# EAGLE board IMU_Board (EAGLE 9.6.2)
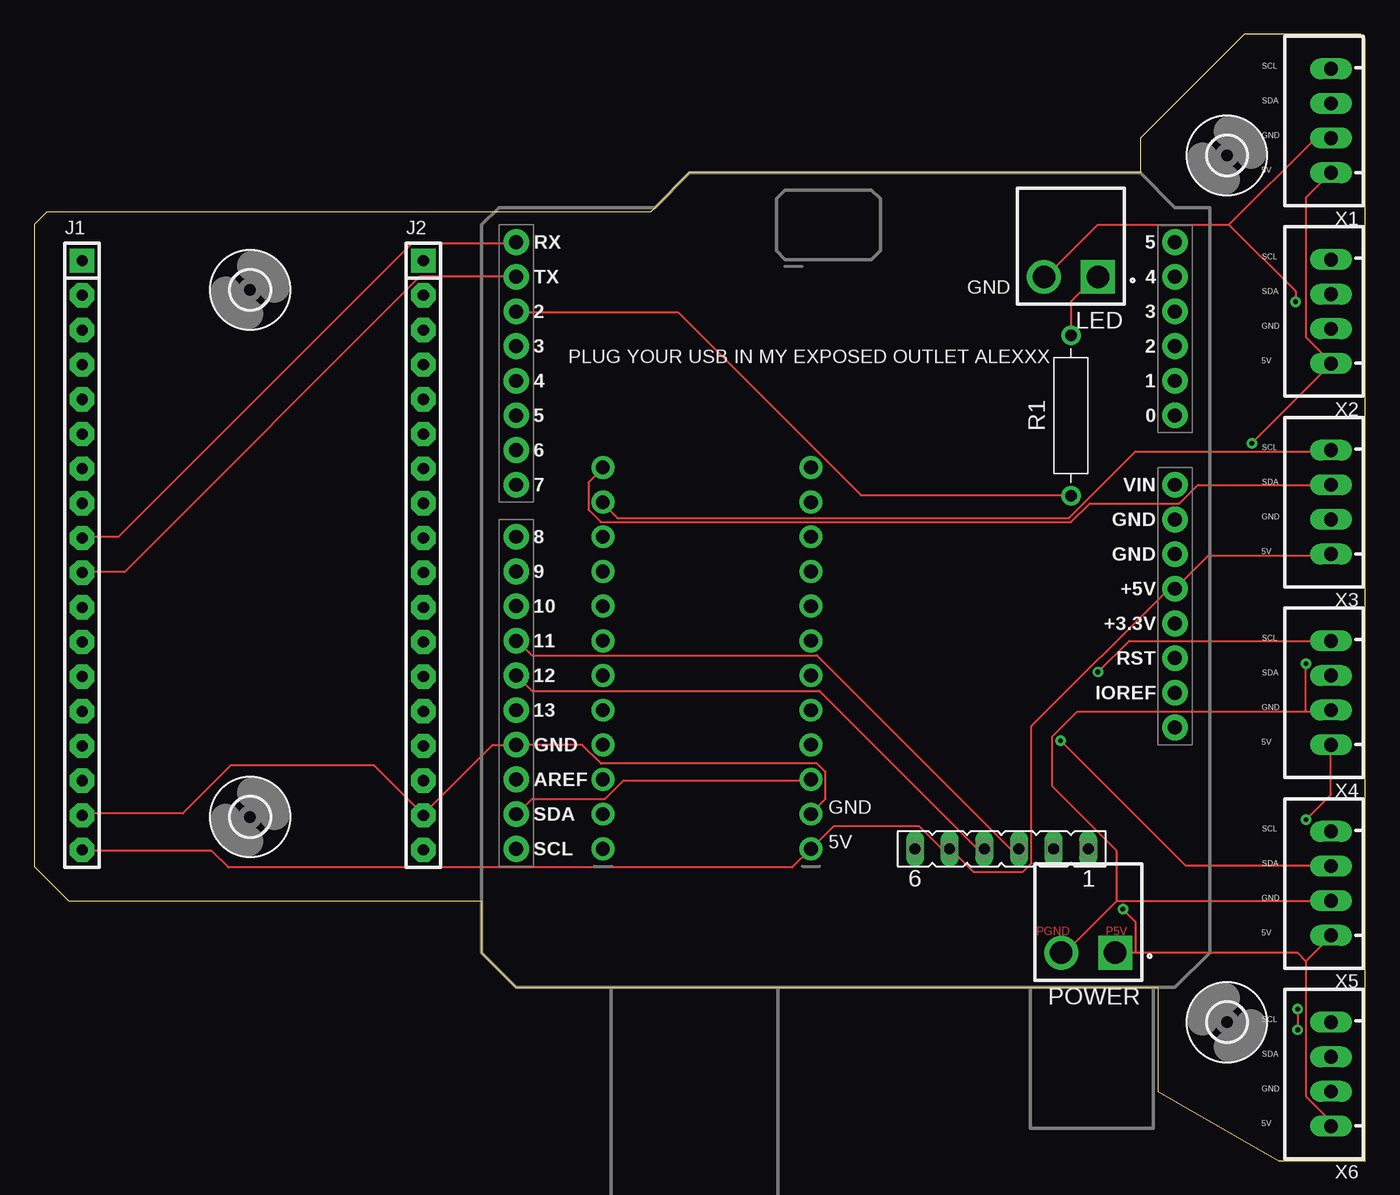
[diagram p0: board, top side]
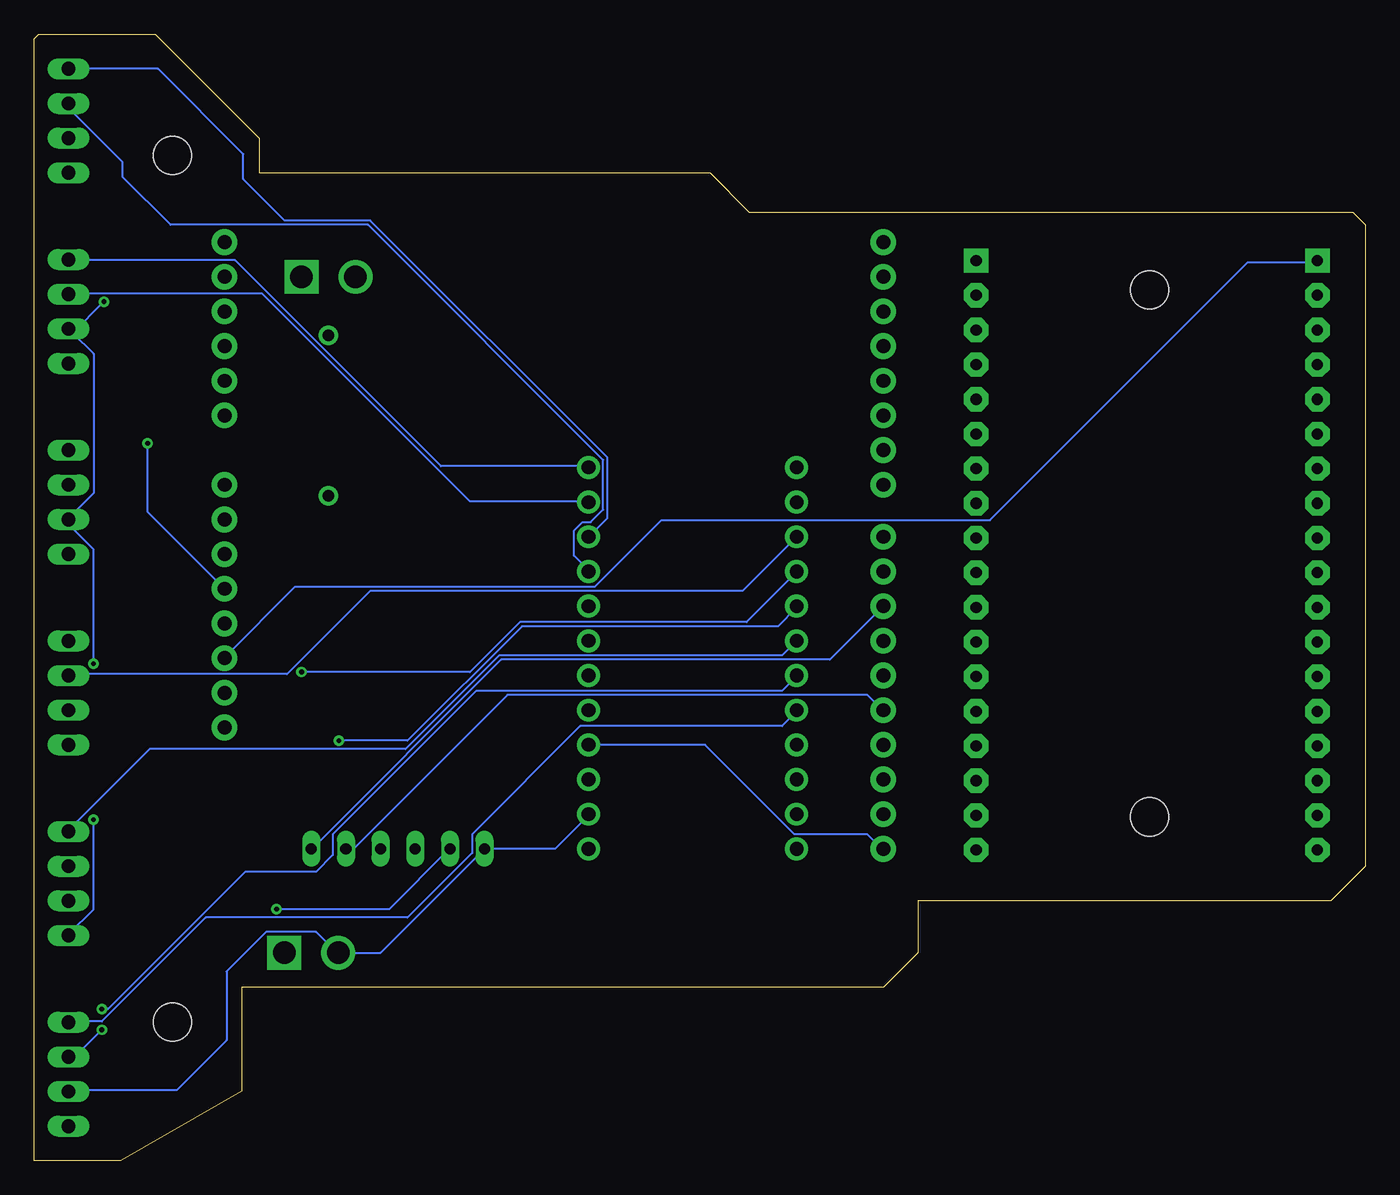
[diagram p1: board, bottom side, seen from below]

Size 97.53 x 82.55 mm. Coordinates in mm from the lower left corner, seen from the top.
Outline: 0,68.58 0,21.59 2.54,19.05 32.78,19.05 32.78,15.24 35.32,12.7 82.31,12.7 82.31,5.08 91.2,0 97.53,0 97.53,82.22 97.2,82.55 88.66,82.55 81.04,74.93 81.04,72.39 48.02,72.39 45.15,69.52 0.94,69.52 0,68.58
Copper layers (1*16): Top 0.035mm / dielectric 1.5mm / Bottom 0.035mm
Design rules "default": minimum track width 6mil, minimum drill 0.35mm, track to track 6mil, track to pad 6mil, pad to pad 6mil, via to via 6mil, smd to smd 6mil, copper to edge 40mil, drill to drill 6mil, minimum pad ring 10mil, minimum via ring 8mil, stop-mask expansion 4mil, vias tented up to drill 0mil, thermal gap 10mil

## Footprints (pad centres in the part's own frame; a part is rotated, then mirrored left to right if it is on the bottom)
UNO_R3_SHIELD = drill 1.016 pad 1.88: 3.3V 24.13,-2.54; 5V 24.13,0; A0 24.13,12.7; A1 24.13,15.24; A2 24.13,17.78; A3 24.13,20.32; A4 24.13,22.86; A5 24.13,25.4; AREF -24.13,-13.97; D2 -24.13,20.32; D3 -24.13,17.78; D4 -24.13,15.24; D5 -24.13,12.7; D6 -24.13,10.16; D7 -24.13,7.62; D8 -24.13,3.81; D9 -24.13,1.27; D10 -24.13,-1.27; D11 -24.13,-3.81; D12 -24.13,-6.35; D13 -24.13,-8.89; GND@0 24.13,2.54; GND@1 24.13,5.08; GND@2 -24.13,-11.43; IOREF 24.13,-7.62; NC 24.13,-10.16; RES 24.13,-5.08; RX -24.13,25.4; SCL -24.13,-19.05; SDA -24.13,-16.51; TX -24.13,22.86; VIN 24.13,7.62
2,8 = hole 2.8: 0,0
SIP-100-18-32 = drill 0.813 pad 1.778 square: 1 -21.59,0 | drill 0.813 pad 1.778 octagon: 2 -19.05,0; 3 -16.51,0; 4 -13.97,0; 5 -11.43,0; 6 -8.89,0; 7 -6.35,0; 8 -3.81,0; 9 -1.27,0; 10 1.27,0; 11 3.81,0; 12 6.35,0; 13 8.89,0; 14 11.43,0; 15 13.97,0; 16 16.51,0; 17 19.05,0; 18 21.59,0
1X12_ROUND = drill 1 pad 1.676: 1 -13.97,0; 2 -11.43,0; 3 -8.89,0; 4 -6.35,0; 5 -3.81,0; 6 -1.27,0; 7 1.27,0; 8 3.81,0; 9 6.35,0; 10 8.89,0; 11 11.43,0; 12 13.97,0
HDR-02 = drill 1.65 square: 1 -1.98,0 | drill 1.65: 2 1.98,0
RESAD1176W63L850D250B = drill 0.83 pad 1.43: 1 -5.88,0; 2 5.88,0
FE06 = drill 0.813 long: 1 -6.35,0; 2 -3.81,0; 3 -1.27,0; 4 1.27,0; 5 3.81,0; 6 6.35,0
JST-XH-04-PACKAGE-LONG-PAD = drill 1.016 long: 1 -3.81,0; 2 -1.27,0; 3 1.27,0; 4 3.81,0

## Placement (x,y rotation side)
B1  ARDUINO_UNO_R3_SHIELDBASIC  [UNO_R3_SHIELD]  59.45,41.91 0 top
H1  MOUNT-HOLE2.8  [2,8]  87.39,73.66 0 top
H2  MOUNT-HOLE2.8  [2,8]  87.39,10.16 90 top
H3  MOUNT-HOLE2.8  [2,8]  15.82,63.81 0 top
H4  MOUNT-HOLE2.8  [2,8]  15.82,25.2 0 top
J1  F-1X18-SIP-100-32  [SIP-100-18-32]  3.51,44.36 270 top
J2  F-1X18-SIP-100-32  [SIP-100-18-32]  28.52,44.36 270 top
JP1  [1X12_ROUND]  41.67,36.83 90 top
JP3  [1X12_ROUND]  56.91,36.83 90 top
LED  B2P-VH(LF)(SN)  [HDR-02]  75.96,64.77 180 top
POWER  B2P-VH(LF)(SN)  [HDR-02]  77.23,15.24 180 top
R1  [RESAD1176W63L850D250B]  75.96,54.61 90 top
SD  [FE06]  70.88,22.86 180 top
X1  JST-XH-04-PIN-LONG-PAD  [JST-XH-04-PACKAGE-LONG-PAD]  95.01,76.2 90 top
X2  JST-XH-04-PIN-LONG-PAD  [JST-XH-04-PACKAGE-LONG-PAD]  95.01,62.23 90 top
X3  JST-XH-04-PIN-LONG-PAD  [JST-XH-04-PACKAGE-LONG-PAD]  95.01,48.26 90 top
X4  JST-XH-04-PIN-LONG-PAD  [JST-XH-04-PACKAGE-LONG-PAD]  95.01,34.29 90 top
X5  JST-XH-04-PIN-LONG-PAD  [JST-XH-04-PACKAGE-LONG-PAD]  95.01,20.32 90 top
X6  JST-XH-04-PIN-LONG-PAD  [JST-XH-04-PACKAGE-LONG-PAD]  95.01,6.35 90 top

## Library data of the parts
B1 = SparkFun-Boards
H1-H4 = holes
J1 J2 = con-headers-jp
JP1 JP3 = microbuilder
LED POWER = Connectors; CREATED_BY: PCBLayout.com; DIGIKEY_PART_NUMBER: 455-1639-ND; MANUFACTURER: JST Sales America Inc.; MPN: B2P-VH(LF)(SN)
R1 = Resistor; CATEGORY: Resistor; SUB-CATEGORY: Fixed
SD = con-lsta; OC_FARNELL: unknown; OC_NEWARK: unknown
X1-X6 = Rembrandt Electronics - JST XH Connectors v1-0

## Nets
0SCL: JP3.10 X1.4
0SDA: JP3.9 X1.3
1SCL: JP3.12 X2.4
1SDA: JP3.11 X2.3
2SCL: JP1.11 X3.4
2SDA: JP1.12 X3.3
3SCL: JP1.9 X4.4
3SDA: JP1.10 X4.3
4SCL: JP1.7 X5.4
4SDA: JP1.8 X5.3
5SCL: JP1.5 X6.4
5SDA: JP1.6 X6.3
6SCL: JP1.3
6SDA: JP1.4
7SCL: JP1.1
7SDA: JP1.2
A5V: B1.5V J1.18 JP3.1 POWER.1 SD.5 X1.1 X2.1 X3.1 X4.1 X5.1 X6.1
AD2: B1.D2 R1.1
AD10: B1.D10 SD.1
AD11: B1.D11 SD.3
AD12: B1.D12 SD.4
AD13: B1.D13 SD.2
AGND: B1.GND@2 J1.17 J2.17 JP3.2 LED.2 POWER.2 SD.6 X1.2 X2.2 X3.2 X4.2 X5.2 X6.2
ARST: B1.RES J1.1
ARX: B1.RX J1.9
ASCL: B1.SCL JP3.4
ASDA: B1.SDA JP3.3
ATX: B1.TX J1.10
R15V: LED.1 R1.2

## Tracks (layer width: path | path; a pad name or v marks a point on that pad's centre or on a via)
0SCL
  Bottom 0.152: X1.4 88.46,80.01 82.21,73.76 82.21,71.93 79.16,68.88 72.91,68.88 55.54,51.51 55.54,47.09 JP3.10
0SDA
  Bottom 0.152: X1.3 95.01,77.11 91.05,73.15 91.05,72.08 87.54,68.58 73.06,68.58 55.84,51.36 55.84,47.7 56.76,46.79 57.37,46.79 57.98,46.18 57.98,44.35 56.91,43.28 JP3.9
1SCL
  Bottom 0.152: X2.4 95.01,65.99 82.82,65.99 67.73,50.9 56.91,50.9 JP3.12
1SDA
  Bottom 0.152: X2.3 95.01,63.55 80.84,63.55 65.6,48.31 56.91,48.31 JP3.11
2SCL
  Top 0.152: X3.4 95.01,51.97 80.68,51.97 75.81,47.09 42.74,47.09 41.67,48.16 JP1.11
2SDA
  Top 0.152: X3.3 85.26,49.53 83.88,48.16 77.33,48.16 75.96,46.79 41.52,46.79 40.6,47.7 40.6,49.68 41.67,50.75 JP1.12
3SCL  (via drill 0.35)
  Top 0.152: X4.4 80.23,38.1 v77.94,35.81
  Bottom 0.152: v77.94,35.81 65.6,35.81 61.94,39.47 45.33,39.47 41.67,43.13 JP1.9
3SDA
  Bottom 0.152: JP1.10 45.63,41.76 72.91,41.76 79.01,35.66 95.01,35.66 X4.3
4SCL
  Bottom 0.152: JP1.7 42.74,37.03 63.46,37.03 70.32,30.18 89.07,30.18 95.01,24.23 X5.4
4SDA  (via drill 0.35)
  Top 0.152: v75.2,30.79 84.34,21.64 95.01,21.64 X5.3
  Bottom 0.152: v75.2,30.79 70.17,30.79 61.79,39.17 43.04,39.17 41.67,40.54 JP1.8
5SCL
  Bottom 0.152: X6.4 95.01,10.21 92.57,10.21 84.95,17.83 70.17,17.83 65.44,22.55 65.44,23.93 57.52,31.85 42.74,31.85 41.67,32.92 JP1.5
5SDA  (via drill 0.35)
  Top 0.152: v92.57,11.12 v92.57,9.6
  Bottom 0.152: X6.3 94.55,7.62 v92.57,9.6 | v92.57,11.12 92.11,11.12 82.06,21.18 76.87,21.18 75.66,22.4 75.66,23.93 65.14,34.44 42.74,34.44 41.67,35.51 JP1.6
A5V  (via drill 0.35)
  Top 0.152: X6.1 95.01,2.9 93.18,4.72 93.18,14.63 | 93.18,14.63 95.01,16.46 X5.1 | X4.1 95.01,26.82 v93.18,24.99 | 80.68,15.24 92.57,15.24 93.18,14.63 | 80.68,15.24 POWER.1 | X1.1 93.18,70.56 93.18,60.35 95.01,58.52 X2.1 95.01,58.37 v89.22,52.58 | X3.1 95.01,44.35 86.02,44.35 B1.5V 83.12,41.91 73.06,31.85 73.06,21.79 72.46,21.18 68.8,21.18 67.12,22.86 SD.5 66.51,22.86 64.84,24.54 58.59,24.54 JP3.1 55.54,21.49 14.24,21.49 13.02,22.71 3.57,22.71 J1.18 | 80.68,15.24 80.68,17.53 v79.77,18.44
  Bottom 0.152: v93.18,24.99 93.18,18.44 95.01,16.61 X5.1 | v89.22,52.58 89.22,47.55 B1.5V | v79.77,18.44 71.54,18.44 67.12,22.86 SD.5
AD2
  Top 0.152: R1.1 75.96,48.77 60.57,48.77 47.16,62.18 35.42,62.18 B1.D2
AD10
  Bottom 0.152: B1.D10 39.23,36.73 63.31,36.73 77.18,22.86 SD.1
AD11
  Top 0.152: SD.3 71.54,22.86 57.37,37.03 36.49,37.03 35.42,38.1 B1.D11
AD12
  Top 0.152: SD.4 69.1,22.86 57.52,34.44 36.49,34.44 35.42,35.51 B1.D12
AD13
  Bottom 0.152: SD.2 74.13,22.86 62.85,34.14 36.49,34.14 35.42,33.07 B1.D13
AGND  (via drill 0.35)
  Top 0.152: 87.54,68.58 93.79,74.83 95.01,74.83 X1.2 | 87.54,68.58 77.94,68.58 74.13,64.77 LED.2 | v92.42,62.94 92.42,63.7 87.54,68.58 | J1.17 3.57,25.45 10.88,25.45 14.39,28.96 24.91,28.96 28.41,25.45 J2.17 28.56,25.45 33.59,30.48 B1.GND@2 40.15,30.48 41.52,29.11 57.37,29.11 57.98,28.5 57.98,26.52 56.91,25.45 JP3.2 | 79.31,19.05 X5.2 | 79.31,19.05 75.5,15.24 POWER.2 | 93.18,32.92 76.42,32.92 74.59,31.09 74.59,27.43 79.31,22.71 79.31,19.05 | 93.18,32.92 95.01,32.92 X4.2 | 93.18,32.92 v93.18,36.42
  Bottom 0.152: 94.71,60.66 93.18,59.13 93.18,48.92 95.01,47.09 X3.2 95.01,46.63 93.18,44.81 v93.18,36.42 | v92.42,62.94 94.71,60.66 | 94.71,60.66 X2.2 | JP3.2 56.91,25.3 59.35,22.86 SD.6 72.15,15.24 POWER.2 75.35,15.24 76.87,16.76 80.53,16.76 83.43,13.87 83.43,8.84 87.09,5.18 95.01,5.18 X6.2
ARST
  Bottom 0.152: J1.1 3.57,65.84 8.6,65.84 27.5,46.94 51.58,46.94 56.45,42.06 78.4,42.06 83.58,36.88 B1.RES
ARX
  Top 0.152: J1.9 3.57,45.72 6.16,45.72 27.65,67.21 35.27,67.21 B1.RX
ASCL
  Bottom 0.152: JP3.4 48.38,30.48 41.82,23.93 36.49,23.93 35.42,22.86 B1.SCL
ASDA
  Top 0.152: JP3.3 56.91,27.89 43.19,27.89 41.82,26.52 36.49,26.52 35.42,25.45 B1.SDA
ATX
  Top 0.152: B1.TX 28.26,64.77 6.62,43.13 3.57,43.13 J1.10
R15V
  Top 0.152: R1.2 75.96,62.94 77.79,64.77 LED.1

## Text on the board
Top: PGND | P5V
tNames: SCL | SDA | GND | 5V | SCL | GND | SDA | GND | PLUG YOUR USB IN MY EXPOSED OUTLET ALEXXX | 5V | SCL | SDA | GND | 5V | SCL | SDA | GND | 5V | GND | SCL | 5V | SDA | GND | 5V | SCL | SDA | GND | 5V